# EAGLE board SparkFun_Servo_Trigger_Panel_v11 (EAGLE 7.5.0), part 1 of 4
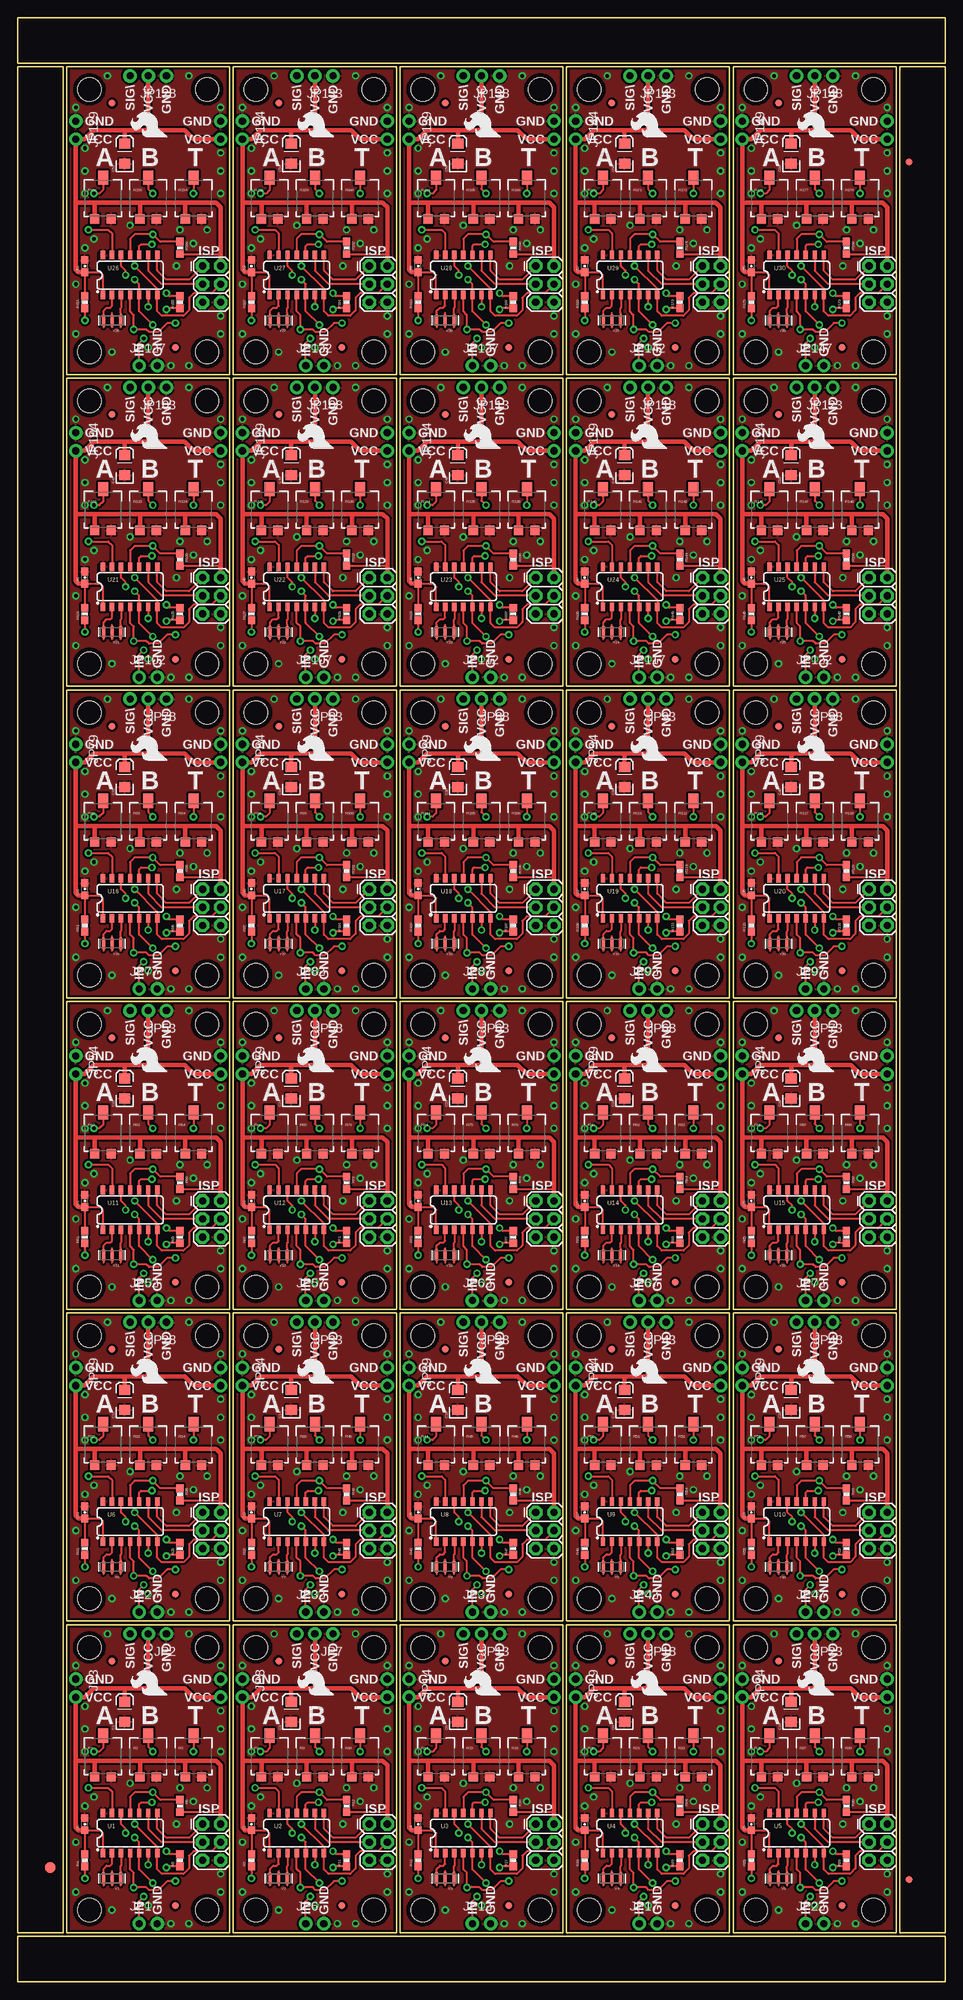
[diagram p0: board, top side]
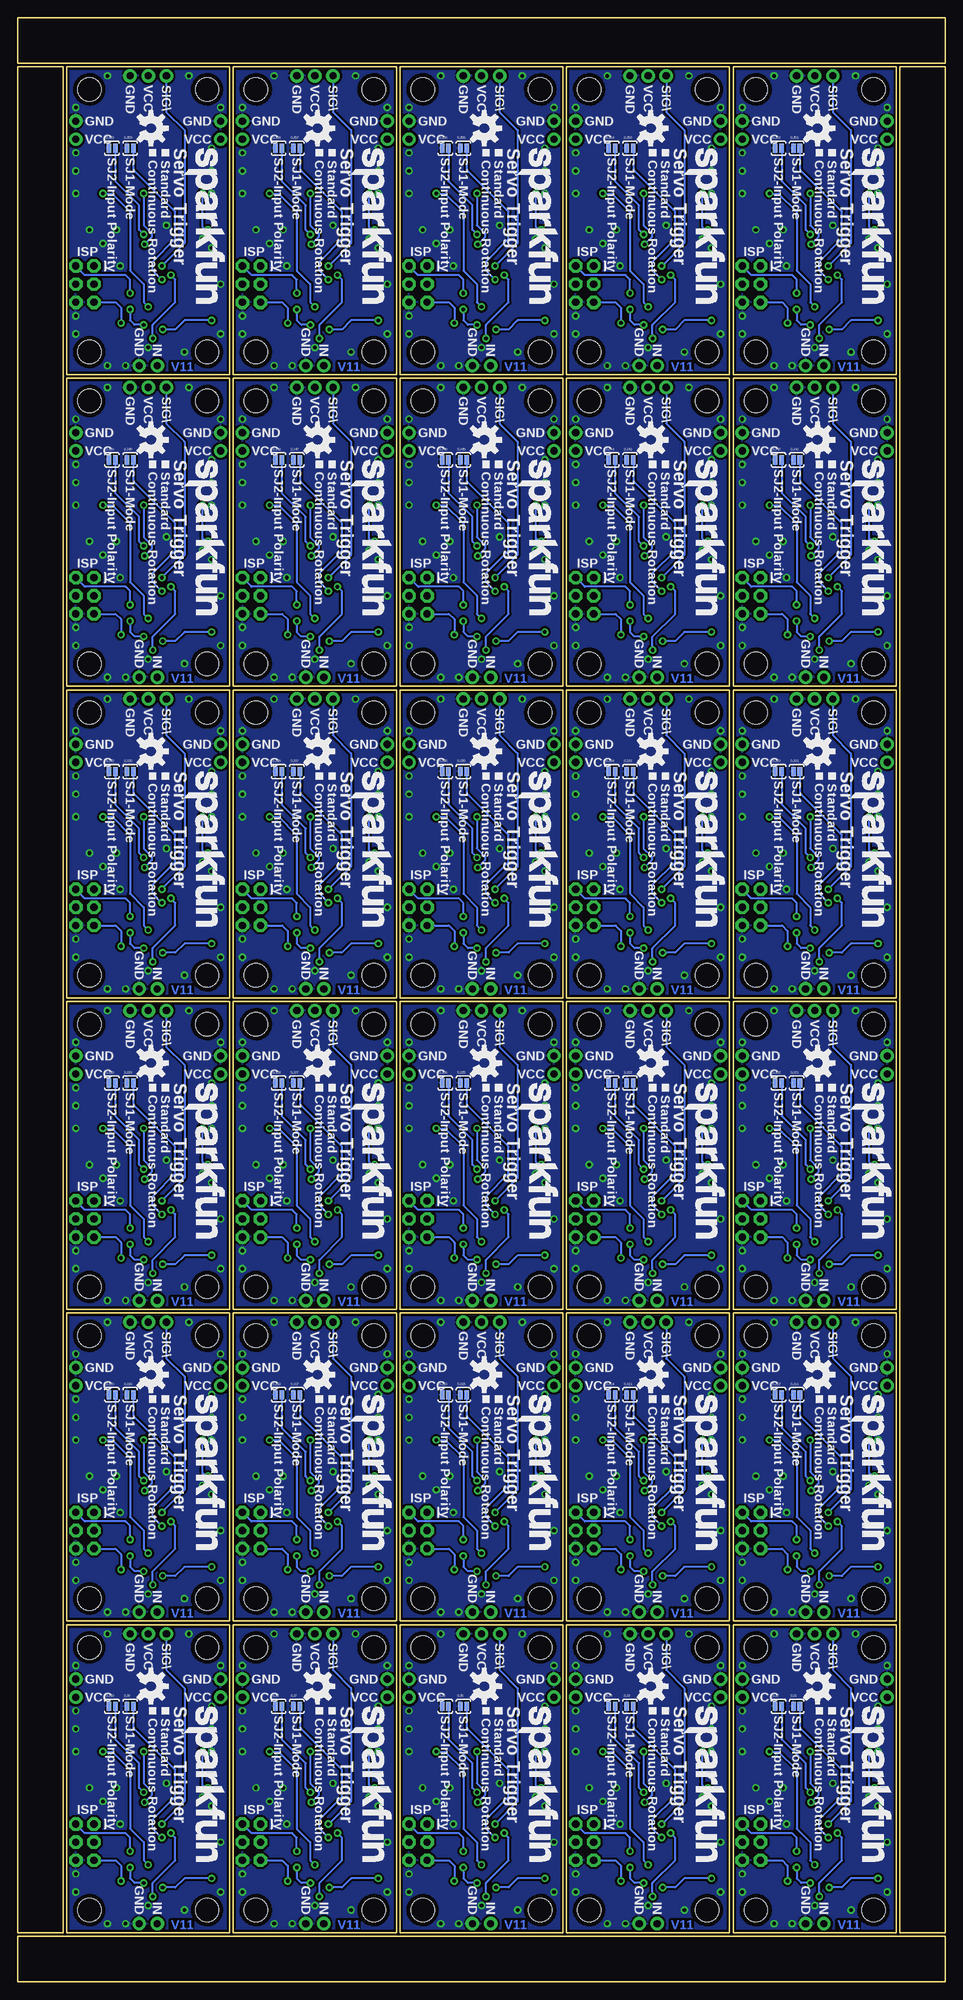
[diagram p1: board, bottom side, seen from below]

Size 130.05 x 275.34 mm. Coordinates in mm from the lower left corner, seen from the top.
Outline: 144 segments
Copper layers (1*16): Top 0.035mm / dielectric 1.5mm / Bottom 0.035mm
Design rules "SparkFun-2-layer-STANDARD": minimum track width 10mil, minimum drill 20mil, track to track 10mil, track to pad 8mil, pad to pad 8mil, via to via 10mil, smd to smd 8mil, copper to edge 8mil, drill to drill 8mil, minimum pad ring 10mil, minimum via ring 10mil, stop-mask expansion 4mil, vias tented up to drill 20mil, thermal gap 10mil
tRestrict: area 11.4,21.6 to 11.6,23.9; area 11.4,22.7 to 13.6,22.9; area 34.8,21.6 to 34.9,23.9; area 34.8,22.7 to 37,22.9; area 58.2,21.6 to 58.3,23.9; area 58.2,22.7 to 60.3,22.9; area 81.5,21.6 to 81.7,23.9; area 81.5,22.7 to 83.7,22.9; area 104.9,21.6 to 105,23.9; area 104.9,22.7 to 107.1,22.9; area 11.4,65.3 to 11.6,67.6; area 11.4,66.4 to 13.6,66.5; 48 more areas

## Footprints (pad centres in the part's own frame; a part is rotated, then mirrored left to right if it is on the bottom)
EIA3216 = smd 1.4 x 1.6: A 1.4,0; C -1.4,0
0603-CAP = smd 1.1 x 1: 1 -0.85,0; 2 0.85,0
FIDUCIAL-1.5X3 = smd 1.5 x 1.5: 1 0,0
FIDUCIAL-1X2 = smd 1 x 1: 1 0,0
1X02_NO_SILK = drill 1.016 pad 1.88: 1 0,0; 2 2.54,0
1X03_NO_SILK = drill 1.016 pad 1.88: 1 0,0; 2 2.54,0; 3 5.08,0
2X3 = drill 1.016 pad 1.88 octagon: 1 0,0; 2 0,2.54; 3 2.54,0; 4 2.54,2.54; 5 5.08,0; 6 5.08,2.54
TRIMPOT_5MM = smd 1.3 x 1.3: A 1.15,-2.54; C -1.15,-2.54 | smd 1.402 x 2: B 0,3.239
0603-RES = smd 1.1 x 1: 1 -0.85,0; 2 0.85,0
PAD-JUMPER-2-NO_YES_SILK = smd 0.635 x 1.27: 1 -0.45,0; 2 0.45,0
STAND-OFF = hole 3.302: 0,0
PAD.03X.04 = smd 1.016 x 1.016: P$1 0,0
SO14 = smd 0.6 x 1.2: 1 -3.81,-2.8; 2 -2.54,-2.8; 3 -1.27,-2.8; 4 0,-2.8; 5 1.27,-2.8; 6 2.54,-2.8; 7 3.81,-2.8; 8 3.81,2.8; 9 2.54,2.8; 10 1.27,2.8; 11 0,2.8; 12 -1.27,2.8; 13 -2.54,2.8; 14 -3.81,2.8
RESONATOR-SMD = smd 0.45 x 1.905: 1 -1.2,0; 2 0,0; 3 1.2,0

## Placement (x,y rotation side)
C1  10uF  [EIA3216]  14.99,37.85 90 top
C2  0.1uF  [0603-CAP]  32.77,22.1 90 top
C3  10uF  [EIA3216]  38.35,37.85 90 top
C4  0.1uF  [0603-CAP]  56.13,22.1 90 top
C5  0.1uF  [0603-CAP]  9.4,22.1 90 top
C6  10uF  [EIA3216]  61.72,37.85 90 top
C7  0.1uF  [0603-CAP]  79.5,22.1 90 top
C8  10uF  [EIA3216]  85.09,37.85 90 top
C9  0.1uF  [0603-CAP]  102.87,22.1 90 top
C10  10uF  [EIA3216]  108.46,37.85 90 top
C11  0.1uF  [0603-CAP]  9.4,65.79 90 top
C12  10uF  [EIA3216]  14.99,81.53 90 top
C13  0.1uF  [0603-CAP]  32.77,65.79 90 top
C14  10uF  [EIA3216]  38.35,81.53 90 top
C15  0.1uF  [0603-CAP]  56.13,65.79 90 top
C16  10uF  [EIA3216]  61.72,81.53 90 top
C17  0.1uF  [0603-CAP]  79.5,65.79 90 top
C18  10uF  [EIA3216]  85.09,81.53 90 top
C19  0.1uF  [0603-CAP]  102.87,65.79 90 top
C20  10uF  [EIA3216]  108.46,81.53 90 top
C21  0.1uF  [0603-CAP]  9.4,109.47 90 top
C22  10uF  [EIA3216]  14.99,125.22 90 top
C23  0.1uF  [0603-CAP]  32.77,109.47 90 top
C24  10uF  [EIA3216]  38.35,125.22 90 top
C25  0.1uF  [0603-CAP]  56.13,109.47 90 top
C26  10uF  [EIA3216]  61.72,125.22 90 top
C27  0.1uF  [0603-CAP]  79.5,109.47 90 top
C28  10uF  [EIA3216]  85.09,125.22 90 top
C29  0.1uF  [0603-CAP]  102.87,109.47 90 top
C30  10uF  [EIA3216]  108.46,125.22 90 top
C31  0.1uF  [0603-CAP]  9.4,153.16 90 top
C32  10uF  [EIA3216]  14.99,168.91 90 top
C33  0.1uF  [0603-CAP]  32.77,153.16 90 top
C34  10uF  [EIA3216]  38.35,168.91 90 top
C35  0.1uF  [0603-CAP]  56.13,153.16 90 top
C36  10uF  [EIA3216]  61.72,168.91 90 top
C37  0.1uF  [0603-CAP]  79.5,153.16 90 top
C38  10uF  [EIA3216]  85.09,168.91 90 top
C39  0.1uF  [0603-CAP]  102.87,153.16 90 top
C40  10uF  [EIA3216]  108.46,168.91 90 top
C41  0.1uF  [0603-CAP]  9.4,196.85 90 top
C42  10uF  [EIA3216]  14.99,212.6 90 top
C43  0.1uF  [0603-CAP]  32.77,196.85 90 top
C44  10uF  [EIA3216]  38.35,212.6 90 top
C45  0.1uF  [0603-CAP]  56.13,196.85 90 top
C46  10uF  [EIA3216]  61.72,212.6 90 top
C47  0.1uF  [0603-CAP]  79.5,196.85 90 top
C48  10uF  [EIA3216]  85.09,212.6 90 top
C49  0.1uF  [0603-CAP]  102.87,196.85 90 top
C50  10uF  [EIA3216]  108.46,212.6 90 top
C51  0.1uF  [0603-CAP]  9.4,240.54 90 top
C52  10uF  [EIA3216]  14.99,256.29 90 top
C53  0.1uF  [0603-CAP]  32.77,240.54 90 top
C54  10uF  [EIA3216]  38.35,256.29 90 top
C55  0.1uF  [0603-CAP]  56.13,240.54 90 top
C56  10uF  [EIA3216]  61.72,256.29 90 top
C57  0.1uF  [0603-CAP]  79.5,240.54 90 top
C58  10uF  [EIA3216]  85.09,256.29 90 top
C59  0.1uF  [0603-CAP]  102.87,240.54 90 top
C60  10uF  [EIA3216]  108.46,256.29 90 top
E$1  [FIDUCIAL-1.5X3]  4.57,16 0 top
E$7  [FIDUCIAL-1X2]  124.97,255.14 90 top
E$8  [FIDUCIAL-1X2]  124.97,14.35 270 top
FID1  FIDUCIAL1X2  [FIDUCIAL-1X2]  13.21,44.96 0 top
FID2  FIDUCIAL1X2  [FIDUCIAL-1X2]  22.1,10.67 0 top
FID3  FIDUCIAL1X2  [FIDUCIAL-1X2]  36.58,44.96 0 top
FID4  FIDUCIAL1X2  [FIDUCIAL-1X2]  45.47,10.67 0 top
FID5  FIDUCIAL1X2  [FIDUCIAL-1X2]  59.94,44.96 0 top
FID6  FIDUCIAL1X2  [FIDUCIAL-1X2]  68.83,10.67 0 top
FID7  FIDUCIAL1X2  [FIDUCIAL-1X2]  83.31,44.96 0 top
FID8  FIDUCIAL1X2  [FIDUCIAL-1X2]  92.2,10.67 0 top
FID9  FIDUCIAL1X2  [FIDUCIAL-1X2]  106.68,44.96 0 top
FID10  FIDUCIAL1X2  [FIDUCIAL-1X2]  115.57,10.67 0 top
FID11  FIDUCIAL1X2  [FIDUCIAL-1X2]  13.21,88.65 0 top
FID12  FIDUCIAL1X2  [FIDUCIAL-1X2]  22.1,54.36 0 top
FID13  FIDUCIAL1X2  [FIDUCIAL-1X2]  36.58,88.65 0 top
FID14  FIDUCIAL1X2  [FIDUCIAL-1X2]  45.47,54.36 0 top
FID15  FIDUCIAL1X2  [FIDUCIAL-1X2]  59.94,88.65 0 top
FID16  FIDUCIAL1X2  [FIDUCIAL-1X2]  68.83,54.36 0 top
FID17  FIDUCIAL1X2  [FIDUCIAL-1X2]  83.31,88.65 0 top
FID18  FIDUCIAL1X2  [FIDUCIAL-1X2]  92.2,54.36 0 top
FID19  FIDUCIAL1X2  [FIDUCIAL-1X2]  106.68,88.65 0 top
FID20  FIDUCIAL1X2  [FIDUCIAL-1X2]  115.57,54.36 0 top
FID21  FIDUCIAL1X2  [FIDUCIAL-1X2]  13.21,132.33 0 top
FID22  FIDUCIAL1X2  [FIDUCIAL-1X2]  22.1,98.04 0 top
FID23  FIDUCIAL1X2  [FIDUCIAL-1X2]  36.58,132.33 0 top
FID24  FIDUCIAL1X2  [FIDUCIAL-1X2]  45.47,98.04 0 top
FID25  FIDUCIAL1X2  [FIDUCIAL-1X2]  59.94,132.33 0 top
FID26  FIDUCIAL1X2  [FIDUCIAL-1X2]  68.83,98.04 0 top
FID27  FIDUCIAL1X2  [FIDUCIAL-1X2]  83.31,132.33 0 top
FID28  FIDUCIAL1X2  [FIDUCIAL-1X2]  92.2,98.04 0 top
FID29  FIDUCIAL1X2  [FIDUCIAL-1X2]  106.68,132.33 0 top
FID30  FIDUCIAL1X2  [FIDUCIAL-1X2]  115.57,98.04 0 top
FID31  FIDUCIAL1X2  [FIDUCIAL-1X2]  13.21,176.02 0 top
FID32  FIDUCIAL1X2  [FIDUCIAL-1X2]  22.1,141.73 0 top
FID33  FIDUCIAL1X2  [FIDUCIAL-1X2]  36.58,176.02 0 top
FID34  FIDUCIAL1X2  [FIDUCIAL-1X2]  45.47,141.73 0 top
FID35  FIDUCIAL1X2  [FIDUCIAL-1X2]  59.94,176.02 0 top
FID36  FIDUCIAL1X2  [FIDUCIAL-1X2]  68.83,141.73 0 top
FID37  FIDUCIAL1X2  [FIDUCIAL-1X2]  83.31,176.02 0 top
FID38  FIDUCIAL1X2  [FIDUCIAL-1X2]  92.2,141.73 0 top
FID39  FIDUCIAL1X2  [FIDUCIAL-1X2]  106.68,176.02 0 top
FID40  FIDUCIAL1X2  [FIDUCIAL-1X2]  115.57,141.73 0 top
FID41  FIDUCIAL1X2  [FIDUCIAL-1X2]  13.21,219.71 0 top
FID42  FIDUCIAL1X2  [FIDUCIAL-1X2]  22.1,185.42 0 top
FID43  FIDUCIAL1X2  [FIDUCIAL-1X2]  36.58,219.71 0 top
FID44  FIDUCIAL1X2  [FIDUCIAL-1X2]  45.47,185.42 0 top
FID45  FIDUCIAL1X2  [FIDUCIAL-1X2]  59.94,219.71 0 top
FID46  FIDUCIAL1X2  [FIDUCIAL-1X2]  68.83,185.42 0 top
FID47  FIDUCIAL1X2  [FIDUCIAL-1X2]  83.31,219.71 0 top
FID48  FIDUCIAL1X2  [FIDUCIAL-1X2]  92.2,185.42 0 top
FID49  FIDUCIAL1X2  [FIDUCIAL-1X2]  106.68,219.71 0 top
FID50  FIDUCIAL1X2  [FIDUCIAL-1X2]  115.57,185.42 0 top
FID51  FIDUCIAL1X2  [FIDUCIAL-1X2]  13.21,263.4 0 top
FID52  FIDUCIAL1X2  [FIDUCIAL-1X2]  22.1,229.11 0 top
FID53  FIDUCIAL1X2  [FIDUCIAL-1X2]  36.58,263.4 0 top
FID54  FIDUCIAL1X2  [FIDUCIAL-1X2]  45.47,229.11 0 top
FID55  FIDUCIAL1X2  [FIDUCIAL-1X2]  59.94,263.4 0 top
FID56  FIDUCIAL1X2  [FIDUCIAL-1X2]  68.83,229.11 0 top
FID57  FIDUCIAL1X2  [FIDUCIAL-1X2]  83.31,263.4 0 top
FID58  FIDUCIAL1X2  [FIDUCIAL-1X2]  92.2,229.11 0 top
FID59  FIDUCIAL1X2  [FIDUCIAL-1X2]  106.68,263.4 0 top
FID60  FIDUCIAL1X2  [FIDUCIAL-1X2]  115.57,229.11 0 top
JP1  M021X02_NO_SILK  [1X02_NO_SILK]  17.02,8.13 0 top
JP2  SERVO-OUT  [1X03_NO_SILK]  20.83,48.77 180 top
JP3  M021X02_NO_SILK  [1X02_NO_SILK]  8.13,42.42 270 top
JP4  M021X02_NO_SILK  [1X02_NO_SILK]  28.45,42.42 270 top
JP5  [2X3]  49.28,22.1 270 top
JP6  M021X02_NO_SILK  [1X02_NO_SILK]  40.39,8.13 0 top
JP7  SERVO-OUT  [1X03_NO_SILK]  44.2,48.77 180 top
JP8  M021X02_NO_SILK  [1X02_NO_SILK]  31.5,42.42 270 top
JP9  [2X3]  25.91,22.1 270 top
JP10  M021X02_NO_SILK  [1X02_NO_SILK]  51.82,42.42 270 top
JP11  [2X3]  72.64,22.1 270 top
JP12  M021X02_NO_SILK  [1X02_NO_SILK]  63.75,8.13 0 top
JP13  SERVO-OUT  [1X03_NO_SILK]  67.56,48.77 180 top
JP14  M021X02_NO_SILK  [1X02_NO_SILK]  54.86,42.42 270 top
JP15  M021X02_NO_SILK  [1X02_NO_SILK]  75.18,42.42 270 top
JP16  [2X3]  96.01,22.1 270 top
JP17  M021X02_NO_SILK  [1X02_NO_SILK]  87.12,8.13 0 top
JP18  SERVO-OUT  [1X03_NO_SILK]  90.93,48.77 180 top
JP19  M021X02_NO_SILK  [1X02_NO_SILK]  78.23,42.42 270 top
JP20  M021X02_NO_SILK  [1X02_NO_SILK]  98.55,42.42 270 top
JP21  [2X3]  119.38,22.1 270 top
JP22  M021X02_NO_SILK  [1X02_NO_SILK]  110.49,8.13 0 top
JP23  SERVO-OUT  [1X03_NO_SILK]  114.3,48.77 180 top
JP24  M021X02_NO_SILK  [1X02_NO_SILK]  101.6,42.42 270 top
JP25  M021X02_NO_SILK  [1X02_NO_SILK]  121.92,42.42 270 top
JP26  [2X3]  25.91,65.79 270 top
JP27  M021X02_NO_SILK  [1X02_NO_SILK]  17.02,51.82 0 top
JP28  SERVO-OUT  [1X03_NO_SILK]  20.83,92.46 180 top
JP29  M021X02_NO_SILK  [1X02_NO_SILK]  8.13,86.11 270 top
JP30  M021X02_NO_SILK  [1X02_NO_SILK]  28.45,86.11 270 top
JP31  [2X3]  49.28,65.79 270 top
JP32  M021X02_NO_SILK  [1X02_NO_SILK]  40.39,51.82 0 top
JP33  SERVO-OUT  [1X03_NO_SILK]  44.2,92.46 180 top
JP34  M021X02_NO_SILK  [1X02_NO_SILK]  31.5,86.11 270 top
JP35  M021X02_NO_SILK  [1X02_NO_SILK]  51.82,86.11 270 top
JP36  [2X3]  72.64,65.79 270 top
JP37  M021X02_NO_SILK  [1X02_NO_SILK]  63.75,51.82 0 top
JP38  SERVO-OUT  [1X03_NO_SILK]  67.56,92.46 180 top
JP39  M021X02_NO_SILK  [1X02_NO_SILK]  54.86,86.11 270 top
JP40  M021X02_NO_SILK  [1X02_NO_SILK]  75.18,86.11 270 top
JP41  [2X3]  96.01,65.79 270 top
JP42  M021X02_NO_SILK  [1X02_NO_SILK]  87.12,51.82 0 top
JP43  SERVO-OUT  [1X03_NO_SILK]  90.93,92.46 180 top
JP44  M021X02_NO_SILK  [1X02_NO_SILK]  78.23,86.11 270 top
JP45  M021X02_NO_SILK  [1X02_NO_SILK]  98.55,86.11 270 top
JP46  [2X3]  119.38,65.79 270 top
JP47  M021X02_NO_SILK  [1X02_NO_SILK]  110.49,51.82 0 top
JP48  SERVO-OUT  [1X03_NO_SILK]  114.3,92.46 180 top
JP49  M021X02_NO_SILK  [1X02_NO_SILK]  101.6,86.11 270 top
JP50  M021X02_NO_SILK  [1X02_NO_SILK]  121.92,86.11 270 top
JP51  [2X3]  25.91,109.47 270 top
JP52  M021X02_NO_SILK  [1X02_NO_SILK]  17.02,95.5 0 top
JP53  SERVO-OUT  [1X03_NO_SILK]  20.83,136.14 180 top
JP54  M021X02_NO_SILK  [1X02_NO_SILK]  8.13,129.79 270 top
JP55  M021X02_NO_SILK  [1X02_NO_SILK]  28.45,129.79 270 top
JP56  [2X3]  49.28,109.47 270 top
JP57  M021X02_NO_SILK  [1X02_NO_SILK]  40.39,95.5 0 top
JP58  SERVO-OUT  [1X03_NO_SILK]  44.2,136.14 180 top
JP59  M021X02_NO_SILK  [1X02_NO_SILK]  31.5,129.79 270 top
JP60  M021X02_NO_SILK  [1X02_NO_SILK]  51.82,129.79 270 top
JP61  [2X3]  72.64,109.47 270 top
JP62  M021X02_NO_SILK  [1X02_NO_SILK]  63.75,95.5 0 top
JP63  SERVO-OUT  [1X03_NO_SILK]  67.56,136.14 180 top
JP64  M021X02_NO_SILK  [1X02_NO_SILK]  54.86,129.79 270 top
JP65  M021X02_NO_SILK  [1X02_NO_SILK]  75.18,129.79 270 top
JP66  [2X3]  96.01,109.47 270 top
JP67  M021X02_NO_SILK  [1X02_NO_SILK]  87.12,95.5 0 top
JP68  SERVO-OUT  [1X03_NO_SILK]  90.93,136.14 180 top
JP69  M021X02_NO_SILK  [1X02_NO_SILK]  78.23,129.79 270 top
JP70  M021X02_NO_SILK  [1X02_NO_SILK]  98.55,129.79 270 top
JP71  [2X3]  119.38,109.47 270 top
JP72  M021X02_NO_SILK  [1X02_NO_SILK]  110.49,95.5 0 top
JP73  SERVO-OUT  [1X03_NO_SILK]  114.3,136.14 180 top
JP74  M021X02_NO_SILK  [1X02_NO_SILK]  101.6,129.79 270 top
JP75  M021X02_NO_SILK  [1X02_NO_SILK]  121.92,129.79 270 top
JP76  [2X3]  25.91,153.16 270 top
JP77  M021X02_NO_SILK  [1X02_NO_SILK]  17.02,139.19 0 top
JP78  SERVO-OUT  [1X03_NO_SILK]  20.83,179.83 180 top
JP79  M021X02_NO_SILK  [1X02_NO_SILK]  8.13,173.48 270 top
JP80  M021X02_NO_SILK  [1X02_NO_SILK]  28.45,173.48 270 top
JP81  [2X3]  49.28,153.16 270 top
JP82  M021X02_NO_SILK  [1X02_NO_SILK]  40.39,139.19 0 top
JP83  SERVO-OUT  [1X03_NO_SILK]  44.2,179.83 180 top
JP84  M021X02_NO_SILK  [1X02_NO_SILK]  31.5,173.48 270 top
JP85  M021X02_NO_SILK  [1X02_NO_SILK]  51.82,173.48 270 top
JP86  [2X3]  72.64,153.16 270 top
JP87  M021X02_NO_SILK  [1X02_NO_SILK]  63.75,139.19 0 top
JP88  SERVO-OUT  [1X03_NO_SILK]  67.56,179.83 180 top
JP89  M021X02_NO_SILK  [1X02_NO_SILK]  54.86,173.48 270 top
JP90  M021X02_NO_SILK  [1X02_NO_SILK]  75.18,173.48 270 top
JP91  [2X3]  96.01,153.16 270 top
JP92  M021X02_NO_SILK  [1X02_NO_SILK]  87.12,139.19 0 top
JP93  SERVO-OUT  [1X03_NO_SILK]  90.93,179.83 180 top
JP94  M021X02_NO_SILK  [1X02_NO_SILK]  78.23,173.48 270 top
JP95  M021X02_NO_SILK  [1X02_NO_SILK]  98.55,173.48 270 top
JP96  [2X3]  119.38,153.16 270 top
JP97  M021X02_NO_SILK  [1X02_NO_SILK]  110.49,139.19 0 top
JP98  SERVO-OUT  [1X03_NO_SILK]  114.3,179.83 180 top
JP99  M021X02_NO_SILK  [1X02_NO_SILK]  101.6,173.48 270 top
JP100  M021X02_NO_SILK  [1X02_NO_SILK]  121.92,173.48 270 top
JP101  [2X3]  25.91,196.85 270 top
JP102  M021X02_NO_SILK  [1X02_NO_SILK]  17.02,182.88 0 top
JP103  SERVO-OUT  [1X03_NO_SILK]  20.83,223.52 180 top
JP104  M021X02_NO_SILK  [1X02_NO_SILK]  8.13,217.17 270 top
JP105  M021X02_NO_SILK  [1X02_NO_SILK]  28.45,217.17 270 top
JP106  [2X3]  49.28,196.85 270 top
JP107  M021X02_NO_SILK  [1X02_NO_SILK]  40.39,182.88 0 top
JP108  SERVO-OUT  [1X03_NO_SILK]  44.2,223.52 180 top
JP109  M021X02_NO_SILK  [1X02_NO_SILK]  31.5,217.17 270 top
JP110  M021X02_NO_SILK  [1X02_NO_SILK]  51.82,217.17 270 top
JP111  [2X3]  72.64,196.85 270 top
JP112  M021X02_NO_SILK  [1X02_NO_SILK]  63.75,182.88 0 top
JP113  SERVO-OUT  [1X03_NO_SILK]  67.56,223.52 180 top
JP114  M021X02_NO_SILK  [1X02_NO_SILK]  54.86,217.17 270 top
JP115  M021X02_NO_SILK  [1X02_NO_SILK]  75.18,217.17 270 top
JP116  [2X3]  96.01,196.85 270 top
JP117  M021X02_NO_SILK  [1X02_NO_SILK]  87.12,182.88 0 top
JP118  SERVO-OUT  [1X03_NO_SILK]  90.93,223.52 180 top
JP119  M021X02_NO_SILK  [1X02_NO_SILK]  78.23,217.17 270 top
JP120  M021X02_NO_SILK  [1X02_NO_SILK]  98.55,217.17 270 top
JP121  [2X3]  119.38,196.85 270 top
JP122  M021X02_NO_SILK  [1X02_NO_SILK]  110.49,182.88 0 top
JP123  SERVO-OUT  [1X03_NO_SILK]  114.3,223.52 180 top
JP124  M021X02_NO_SILK  [1X02_NO_SILK]  101.6,217.17 270 top
JP125  M021X02_NO_SILK  [1X02_NO_SILK]  121.92,217.17 270 top
JP126  [2X3]  25.91,240.54 270 top
JP127  M021X02_NO_SILK  [1X02_NO_SILK]  17.02,226.57 0 top
JP128  SERVO-OUT  [1X03_NO_SILK]  20.83,267.21 180 top
JP129  M021X02_NO_SILK  [1X02_NO_SILK]  8.13,260.86 270 top
JP130  M021X02_NO_SILK  [1X02_NO_SILK]  28.45,260.86 270 top
JP131  [2X3]  49.28,240.54 270 top
JP132  M021X02_NO_SILK  [1X02_NO_SILK]  40.39,226.57 0 top
JP133  SERVO-OUT  [1X03_NO_SILK]  44.2,267.21 180 top
JP134  M021X02_NO_SILK  [1X02_NO_SILK]  31.5,260.86 270 top
JP135  M021X02_NO_SILK  [1X02_NO_SILK]  51.82,260.86 270 top
JP136  [2X3]  72.64,240.54 270 top
JP137  M021X02_NO_SILK  [1X02_NO_SILK]  63.75,226.57 0 top
JP138  SERVO-OUT  [1X03_NO_SILK]  67.56,267.21 180 top
JP139  M021X02_NO_SILK  [1X02_NO_SILK]  54.86,260.86 270 top
JP140  M021X02_NO_SILK  [1X02_NO_SILK]  75.18,260.86 270 top
JP141  [2X3]  96.01,240.54 270 top
JP142  M021X02_NO_SILK  [1X02_NO_SILK]  87.12,226.57 0 top
JP143  SERVO-OUT  [1X03_NO_SILK]  90.93,267.21 180 top
JP144  M021X02_NO_SILK  [1X02_NO_SILK]  78.23,260.86 270 top
JP145  M021X02_NO_SILK  [1X02_NO_SILK]  98.55,260.86 270 top
JP146  [2X3]  119.38,240.54 270 top
JP147  M021X02_NO_SILK  [1X02_NO_SILK]  110.49,226.57 0 top
JP148  SERVO-OUT  [1X03_NO_SILK]  114.3,267.21 180 top
JP149  M021X02_NO_SILK  [1X02_NO_SILK]  101.6,260.86 270 top
JP150  M021X02_NO_SILK  [1X02_NO_SILK]  121.92,260.86 270 top
LOGO1  OSHW-LOGOM  [OSHW-LOGO-M]  17.91,41.42 270 bottom
LOGO2  SFE_LOGO_NAME.2_INCH  [SFE_LOGO_NAME_.2]  13.21,38.61 270 bottom
LOGO3  SFE_LOGO_FLAME.2_INCH  [SFE_LOGO_FLAME_.2]  21.21,39.88 90 top
LOGO4  OSHW-LOGOM  [OSHW-LOGO-M]  41.27,41.42 270 bottom
LOGO5  SFE_LOGO_NAME.2_INCH  [SFE_LOGO_NAME_.2]  36.58,38.61 270 bottom
LOGO6  SFE_LOGO_FLAME.2_INCH  [SFE_LOGO_FLAME_.2]  44.58,39.88 90 top
LOGO7  OSHW-LOGOM  [OSHW-LOGO-M]  64.64,41.42 270 bottom
LOGO8  SFE_LOGO_NAME.2_INCH  [SFE_LOGO_NAME_.2]  59.94,38.61 270 bottom
LOGO9  SFE_LOGO_FLAME.2_INCH  [SFE_LOGO_FLAME_.2]  67.94,39.88 90 top
LOGO10  OSHW-LOGOM  [OSHW-LOGO-M]  88.01,41.42 270 bottom
LOGO11  SFE_LOGO_NAME.2_INCH  [SFE_LOGO_NAME_.2]  83.31,38.61 270 bottom
LOGO12  SFE_LOGO_FLAME.2_INCH  [SFE_LOGO_FLAME_.2]  91.31,39.88 90 top
LOGO13  OSHW-LOGOM  [OSHW-LOGO-M]  111.38,41.42 270 bottom
LOGO14  SFE_LOGO_NAME.2_INCH  [SFE_LOGO_NAME_.2]  106.68,38.61 270 bottom
LOGO15  SFE_LOGO_FLAME.2_INCH  [SFE_LOGO_FLAME_.2]  114.68,39.88 90 top
LOGO16  OSHW-LOGOM  [OSHW-LOGO-M]  17.91,85.11 270 bottom
LOGO17  SFE_LOGO_NAME.2_INCH  [SFE_LOGO_NAME_.2]  13.21,82.3 270 bottom
LOGO18  SFE_LOGO_FLAME.2_INCH  [SFE_LOGO_FLAME_.2]  21.21,83.57 90 top
LOGO19  OSHW-LOGOM  [OSHW-LOGO-M]  41.27,85.11 270 bottom
LOGO20  SFE_LOGO_NAME.2_INCH  [SFE_LOGO_NAME_.2]  36.58,82.3 270 bottom
LOGO21  SFE_LOGO_FLAME.2_INCH  [SFE_LOGO_FLAME_.2]  44.58,83.57 90 top
LOGO22  OSHW-LOGOM  [OSHW-LOGO-M]  64.64,85.11 270 bottom
LOGO23  SFE_LOGO_NAME.2_INCH  [SFE_LOGO_NAME_.2]  59.94,82.3 270 bottom
LOGO24  SFE_LOGO_FLAME.2_INCH  [SFE_LOGO_FLAME_.2]  67.94,83.57 90 top
LOGO25  OSHW-LOGOM  [OSHW-LOGO-M]  88.01,85.11 270 bottom
LOGO26  SFE_LOGO_NAME.2_INCH  [SFE_LOGO_NAME_.2]  83.31,82.3 270 bottom
LOGO27  SFE_LOGO_FLAME.2_INCH  [SFE_LOGO_FLAME_.2]  91.31,83.57 90 top
LOGO28  OSHW-LOGOM  [OSHW-LOGO-M]  111.38,85.11 270 bottom
LOGO29  SFE_LOGO_NAME.2_INCH  [SFE_LOGO_NAME_.2]  106.68,82.3 270 bottom
LOGO30  SFE_LOGO_FLAME.2_INCH  [SFE_LOGO_FLAME_.2]  114.68,83.57 90 top
LOGO31  OSHW-LOGOM  [OSHW-LOGO-M]  17.91,128.79 270 bottom
LOGO32  SFE_LOGO_NAME.2_INCH  [SFE_LOGO_NAME_.2]  13.21,125.98 270 bottom
LOGO33  SFE_LOGO_FLAME.2_INCH  [SFE_LOGO_FLAME_.2]  21.21,127.25 90 top
LOGO34  OSHW-LOGOM  [OSHW-LOGO-M]  41.27,128.79 270 bottom
LOGO35  SFE_LOGO_NAME.2_INCH  [SFE_LOGO_NAME_.2]  36.58,125.98 270 bottom
LOGO36  SFE_LOGO_FLAME.2_INCH  [SFE_LOGO_FLAME_.2]  44.58,127.25 90 top
LOGO37  OSHW-LOGOM  [OSHW-LOGO-M]  64.64,128.79 270 bottom
LOGO38  SFE_LOGO_NAME.2_INCH  [SFE_LOGO_NAME_.2]  59.94,125.98 270 bottom
LOGO39  SFE_LOGO_FLAME.2_INCH  [SFE_LOGO_FLAME_.2]  67.94,127.25 90 top
LOGO40  OSHW-LOGOM  [OSHW-LOGO-M]  88.01,128.79 270 bottom
LOGO41  SFE_LOGO_NAME.2_INCH  [SFE_LOGO_NAME_.2]  83.31,125.98 270 bottom
LOGO42  SFE_LOGO_FLAME.2_INCH  [SFE_LOGO_FLAME_.2]  91.31,127.25 90 top
LOGO43  OSHW-LOGOM  [OSHW-LOGO-M]  111.38,128.79 270 bottom
LOGO44  SFE_LOGO_NAME.2_INCH  [SFE_LOGO_NAME_.2]  106.68,125.98 270 bottom
LOGO45  SFE_LOGO_FLAME.2_INCH  [SFE_LOGO_FLAME_.2]  114.68,127.25 90 top
LOGO46  OSHW-LOGOM  [OSHW-LOGO-M]  17.91,172.48 270 bottom
LOGO47  SFE_LOGO_NAME.2_INCH  [SFE_LOGO_NAME_.2]  13.21,169.67 270 bottom
LOGO48  SFE_LOGO_FLAME.2_INCH  [SFE_LOGO_FLAME_.2]  21.21,170.94 90 top
LOGO49  OSHW-LOGOM  [OSHW-LOGO-M]  41.27,172.48 270 bottom
LOGO50  SFE_LOGO_NAME.2_INCH  [SFE_LOGO_NAME_.2]  36.58,169.67 270 bottom
LOGO51  SFE_LOGO_FLAME.2_INCH  [SFE_LOGO_FLAME_.2]  44.58,170.94 90 top
LOGO52  OSHW-LOGOM  [OSHW-LOGO-M]  64.64,172.48 270 bottom
LOGO53  SFE_LOGO_NAME.2_INCH  [SFE_LOGO_NAME_.2]  59.94,169.67 270 bottom
LOGO54  SFE_LOGO_FLAME.2_INCH  [SFE_LOGO_FLAME_.2]  67.94,170.94 90 top
LOGO55  OSHW-LOGOM  [OSHW-LOGO-M]  88.01,172.48 270 bottom
LOGO56  SFE_LOGO_NAME.2_INCH  [SFE_LOGO_NAME_.2]  83.31,169.67 270 bottom
LOGO57  SFE_LOGO_FLAME.2_INCH  [SFE_LOGO_FLAME_.2]  91.31,170.94 90 top
LOGO58  OSHW-LOGOM  [OSHW-LOGO-M]  111.38,172.48 270 bottom
LOGO59  SFE_LOGO_NAME.2_INCH  [SFE_LOGO_NAME_.2]  106.68,169.67 270 bottom
LOGO60  SFE_LOGO_FLAME.2_INCH  [SFE_LOGO_FLAME_.2]  114.68,170.94 90 top
LOGO61  OSHW-LOGOM  [OSHW-LOGO-M]  17.91,216.17 270 bottom
LOGO62  SFE_LOGO_NAME.2_INCH  [SFE_LOGO_NAME_.2]  13.21,213.36 270 bottom
LOGO63  SFE_LOGO_FLAME.2_INCH  [SFE_LOGO_FLAME_.2]  21.21,214.63 90 top
LOGO64  OSHW-LOGOM  [OSHW-LOGO-M]  41.27,216.17 270 bottom
LOGO65  SFE_LOGO_NAME.2_INCH  [SFE_LOGO_NAME_.2]  36.58,213.36 270 bottom
LOGO66  SFE_LOGO_FLAME.2_INCH  [SFE_LOGO_FLAME_.2]  44.58,214.63 90 top
LOGO67  OSHW-LOGOM  [OSHW-LOGO-M]  64.64,216.17 270 bottom
LOGO68  SFE_LOGO_NAME.2_INCH  [SFE_LOGO_NAME_.2]  59.94,213.36 270 bottom
LOGO69  SFE_LOGO_FLAME.2_INCH  [SFE_LOGO_FLAME_.2]  67.94,214.63 90 top
LOGO70  OSHW-LOGOM  [OSHW-LOGO-M]  88.01,216.17 270 bottom
LOGO71  SFE_LOGO_NAME.2_INCH  [SFE_LOGO_NAME_.2]  83.31,213.36 270 bottom
LOGO72  SFE_LOGO_FLAME.2_INCH  [SFE_LOGO_FLAME_.2]  91.31,214.63 90 top
LOGO73  OSHW-LOGOM  [OSHW-LOGO-M]  111.38,216.17 270 bottom
LOGO74  SFE_LOGO_NAME.2_INCH  [SFE_LOGO_NAME_.2]  106.68,213.36 270 bottom
LOGO75  SFE_LOGO_FLAME.2_INCH  [SFE_LOGO_FLAME_.2]  114.68,214.63 90 top
LOGO76  OSHW-LOGOM  [OSHW-LOGO-M]  17.91,259.86 270 bottom
LOGO77  SFE_LOGO_NAME.2_INCH  [SFE_LOGO_NAME_.2]  13.21,257.05 270 bottom
LOGO78  SFE_LOGO_FLAME.2_INCH  [SFE_LOGO_FLAME_.2]  21.21,258.32 90 top
LOGO79  OSHW-LOGOM  [OSHW-LOGO-M]  41.27,259.86 270 bottom
LOGO80  SFE_LOGO_NAME.2_INCH  [SFE_LOGO_NAME_.2]  36.58,257.05 270 bottom
LOGO81  SFE_LOGO_FLAME.2_INCH  [SFE_LOGO_FLAME_.2]  44.58,258.32 90 top
LOGO82  OSHW-LOGOM  [OSHW-LOGO-M]  64.64,259.86 270 bottom
LOGO83  SFE_LOGO_NAME.2_INCH  [SFE_LOGO_NAME_.2]  59.94,257.05 270 bottom
LOGO84  SFE_LOGO_FLAME.2_INCH  [SFE_LOGO_FLAME_.2]  67.94,258.32 90 top
LOGO85  OSHW-LOGOM  [OSHW-LOGO-M]  88.01,259.86 270 bottom
LOGO86  SFE_LOGO_NAME.2_INCH  [SFE_LOGO_NAME_.2]  83.31,257.05 270 bottom
LOGO87  SFE_LOGO_FLAME.2_INCH  [SFE_LOGO_FLAME_.2]  91.31,258.32 90 top
LOGO88  OSHW-LOGOM  [OSHW-LOGO-M]  111.38,259.86 270 bottom
LOGO89  SFE_LOGO_NAME.2_INCH  [SFE_LOGO_NAME_.2]  106.68,257.05 270 bottom
LOGO90  SFE_LOGO_FLAME.2_INCH  [SFE_LOGO_FLAME_.2]  114.68,258.32 90 top
R1  10k  [TRIMPOT_5MM]  11.94,31.26 0 top
R2  10k  [TRIMPOT_5MM]  18.29,31.26 0 top
R3  10k  [TRIMPOT_5MM]  24.64,31.26 0 top
R4  10K  [0603-RES]  9.4,17.02 90 top
R5  10K  [0603-RES]  22.73,17.02 90 top
R6  10K  [0603-RES]  22.73,24.64 270 top
R7  10K  [0603-RES]  32.77,17.02 90 top
R8  10k  [TRIMPOT_5MM]  35.31,31.26 0 top
R9  10k  [TRIMPOT_5MM]  41.66,31.26 0 top
R10  10k  [TRIMPOT_5MM]  48.01,31.26 0 top
R11  10K  [0603-RES]  46.1,17.02 90 top
R12  10K  [0603-RES]  46.1,24.64 270 top
R13  10K  [0603-RES]  56.13,17.02 90 top
R14  10k  [TRIMPOT_5MM]  58.67,31.26 0 top
R15  10k  [TRIMPOT_5MM]  65.02,31.26 0 top
R16  10k  [TRIMPOT_5MM]  71.37,31.26 0 top
R17  10K  [0603-RES]  69.47,17.02 90 top
R18  10K  [0603-RES]  69.47,24.64 270 top
R19  10K  [0603-RES]  79.5,17.02 90 top
R20  10k  [TRIMPOT_5MM]  82.04,31.26 0 top
R21  10k  [TRIMPOT_5MM]  88.39,31.26 0 top
R22  10k  [TRIMPOT_5MM]  94.74,31.26 0 top
R23  10K  [0603-RES]  92.84,17.02 90 top
R24  10K  [0603-RES]  92.84,24.64 270 top
R25  10K  [0603-RES]  102.87,17.02 90 top
R26  10k  [TRIMPOT_5MM]  105.41,31.26 0 top
R27  10k  [TRIMPOT_5MM]  111.76,31.26 0 top
R28  10k  [TRIMPOT_5MM]  118.11,31.26 0 top
R29  10K  [0603-RES]  116.2,17.02 90 top
R30  10K  [0603-RES]  116.2,24.64 270 top
R31  10K  [0603-RES]  9.4,60.71 90 top
R32  10k  [TRIMPOT_5MM]  11.94,74.95 0 top
R33  10k  [TRIMPOT_5MM]  18.29,74.95 0 top
R34  10k  [TRIMPOT_5MM]  24.64,74.95 0 top
R35  10K  [0603-RES]  22.73,60.71 90 top
R36  10K  [0603-RES]  22.73,68.33 270 top
R37  10K  [0603-RES]  32.77,60.71 90 top
R38  10k  [TRIMPOT_5MM]  35.31,74.95 0 top
R39  10k  [TRIMPOT_5MM]  41.66,74.95 0 top
R40  10k  [TRIMPOT_5MM]  48.01,74.95 0 top
R41  10K  [0603-RES]  46.1,60.71 90 top
R42  10K  [0603-RES]  46.1,68.33 270 top
R43  10K  [0603-RES]  56.13,60.71 90 top
R44  10k  [TRIMPOT_5MM]  58.67,74.95 0 top
R45  10k  [TRIMPOT_5MM]  65.02,74.95 0 top
R46  10k  [TRIMPOT_5MM]  71.37,74.95 0 top
R47  10K  [0603-RES]  69.47,60.71 90 top
R48  10K  [0603-RES]  69.47,68.33 270 top
R49  10K  [0603-RES]  79.5,60.71 90 top
R50  10k  [TRIMPOT_5MM]  82.04,74.95 0 top
R51  10k  [TRIMPOT_5MM]  88.39,74.95 0 top
R52  10k  [TRIMPOT_5MM]  94.74,74.95 0 top
R53  10K  [0603-RES]  92.84,60.71 90 top
R54  10K  [0603-RES]  92.84,68.33 270 top
R55  10K  [0603-RES]  102.87,60.71 90 top
R56  10k  [TRIMPOT_5MM]  105.41,74.95 0 top
R57  10k  [TRIMPOT_5MM]  111.76,74.95 0 top
R58  10k  [TRIMPOT_5MM]  118.11,74.95 0 top
R59  10K  [0603-RES]  116.2,60.71 90 top
R60  10K  [0603-RES]  116.2,68.33 270 top
R61  10K  [0603-RES]  9.4,104.39 90 top
R62  10k  [TRIMPOT_5MM]  11.94,118.63 0 top
R63  10k  [TRIMPOT_5MM]  18.29,118.63 0 top
R64  10k  [TRIMPOT_5MM]  24.64,118.63 0 top
R65  10K  [0603-RES]  22.73,104.39 90 top
R66  10K  [0603-RES]  22.73,112.01 270 top
R67  10K  [0603-RES]  32.77,104.39 90 top
R68  10k  [TRIMPOT_5MM]  35.31,118.63 0 top
R69  10k  [TRIMPOT_5MM]  41.66,118.63 0 top
R70  10k  [TRIMPOT_5MM]  48.01,118.63 0 top
R71  10K  [0603-RES]  46.1,104.39 90 top
R72  10K  [0603-RES]  46.1,112.01 270 top
R73  10K  [0603-RES]  56.13,104.39 90 top
R74  10k  [TRIMPOT_5MM]  58.67,118.63 0 top
R75  10k  [TRIMPOT_5MM]  65.02,118.63 0 top
R76  10k  [TRIMPOT_5MM]  71.37,118.63 0 top
R77  10K  [0603-RES]  69.47,104.39 90 top
R78  10K  [0603-RES]  69.47,112.01 270 top
R79  10K  [0603-RES]  79.5,104.39 90 top
R80  10k  [TRIMPOT_5MM]  82.04,118.63 0 top
R81  10k  [TRIMPOT_5MM]  88.39,118.63 0 top
R82  10k  [TRIMPOT_5MM]  94.74,118.63 0 top
R83  10K  [0603-RES]  92.84,104.39 90 top
R84  10K  [0603-RES]  92.84,112.01 270 top
R85  10K  [0603-RES]  102.87,104.39 90 top
R86  10k  [TRIMPOT_5MM]  105.41,118.63 0 top
R87  10k  [TRIMPOT_5MM]  111.76,118.63 0 top
R88  10k  [TRIMPOT_5MM]  118.11,118.63 0 top
R89  10K  [0603-RES]  116.2,104.39 90 top
R90  10K  [0603-RES]  116.2,112.01 270 top
R91  10K  [0603-RES]  9.4,148.08 90 top
R92  10k  [TRIMPOT_5MM]  11.94,162.32 0 top
R93  10k  [TRIMPOT_5MM]  18.29,162.32 0 top
R94  10k  [TRIMPOT_5MM]  24.64,162.32 0 top
R95  10K  [0603-RES]  22.73,148.08 90 top
R96  10K  [0603-RES]  22.73,155.7 270 top
R97  10K  [0603-RES]  32.77,148.08 90 top
R98  10k  [TRIMPOT_5MM]  35.31,162.32 0 top
R99  10k  [TRIMPOT_5MM]  41.66,162.32 0 top
R100  10k  [TRIMPOT_5MM]  48.01,162.32 0 top
R101  10K  [0603-RES]  46.1,148.08 90 top
R102  10K  [0603-RES]  46.1,155.7 270 top
R103  10K  [0603-RES]  56.13,148.08 90 top
R104  10k  [TRIMPOT_5MM]  58.67,162.32 0 top
R105  10k  [TRIMPOT_5MM]  65.02,162.32 0 top
R106  10k  [TRIMPOT_5MM]  71.37,162.32 0 top
R107  10K  [0603-RES]  69.47,148.08 90 top
R108  10K  [0603-RES]  69.47,155.7 270 top
R109  10K  [0603-RES]  79.5,148.08 90 top
R110  10k  [TRIMPOT_5MM]  82.04,162.32 0 top
R111  10k  [TRIMPOT_5MM]  88.39,162.32 0 top
R112  10k  [TRIMPOT_5MM]  94.74,162.32 0 top
R113  10K  [0603-RES]  92.84,148.08 90 top
R114  10K  [0603-RES]  92.84,155.7 270 top
R115  10K  [0603-RES]  102.87,148.08 90 top
R116  10k  [TRIMPOT_5MM]  105.41,162.32 0 top
R117  10k  [TRIMPOT_5MM]  111.76,162.32 0 top
R118  10k  [TRIMPOT_5MM]  118.11,162.32 0 top
R119  10K  [0603-RES]  116.2,148.08 90 top
R120  10K  [0603-RES]  116.2,155.7 270 top
R121  10K  [0603-RES]  9.4,191.77 90 top
R122  10k  [TRIMPOT_5MM]  11.94,206.01 0 top
R123  10k  [TRIMPOT_5MM]  18.29,206.01 0 top
R124  10k  [TRIMPOT_5MM]  24.64,206.01 0 top
R125  10K  [0603-RES]  22.73,191.77 90 top
R126  10K  [0603-RES]  22.73,199.39 270 top
R127  10K  [0603-RES]  32.77,191.77 90 top
R128  10k  [TRIMPOT_5MM]  35.31,206.01 0 top
R129  10k  [TRIMPOT_5MM]  41.66,206.01 0 top
R130  10k  [TRIMPOT_5MM]  48.01,206.01 0 top
R131  10K  [0603-RES]  46.1,191.77 90 top
R132  10K  [0603-RES]  46.1,199.39 270 top
R133  10K  [0603-RES]  56.13,191.77 90 top
R134  10k  [TRIMPOT_5MM]  58.67,206.01 0 top
R135  10k  [TRIMPOT_5MM]  65.02,206.01 0 top
R136  10k  [TRIMPOT_5MM]  71.37,206.01 0 top
R137  10K  [0603-RES]  69.47,191.77 90 top
R138  10K  [0603-RES]  69.47,199.39 270 top
R139  10K  [0603-RES]  79.5,191.77 90 top
R140  10k  [TRIMPOT_5MM]  82.04,206.01 0 top
R141  10k  [TRIMPOT_5MM]  88.39,206.01 0 top
R142  10k  [TRIMPOT_5MM]  94.74,206.01 0 top
R143  10K  [0603-RES]  92.84,191.77 90 top
R144  10K  [0603-RES]  92.84,199.39 270 top
R145  10K  [0603-RES]  102.87,191.77 90 top
R146  10k  [TRIMPOT_5MM]  105.41,206.01 0 top
R147  10k  [TRIMPOT_5MM]  111.76,206.01 0 top
R148  10k  [TRIMPOT_5MM]  118.11,206.01 0 top
R149  10K  [0603-RES]  116.2,191.77 90 top
R150  10K  [0603-RES]  116.2,199.39 270 top
R151  10K  [0603-RES]  9.4,235.46 90 top
R152  10k  [TRIMPOT_5MM]  11.94,249.7 0 top
R153  10k  [TRIMPOT_5MM]  18.29,249.7 0 top
R154  10k  [TRIMPOT_5MM]  24.64,249.7 0 top
R155  10K  [0603-RES]  22.73,235.46 90 top
R156  10K  [0603-RES]  22.73,243.08 270 top
R157  10K  [0603-RES]  32.77,235.46 90 top
R158  10k  [TRIMPOT_5MM]  35.31,249.7 0 top
R159  10k  [TRIMPOT_5MM]  41.66,249.7 0 top
R160  10k  [TRIMPOT_5MM]  48.01,249.7 0 top
R161  10K  [0603-RES]  46.1,235.46 90 top
R162  10K  [0603-RES]  46.1,243.08 270 top
R163  10K  [0603-RES]  56.13,235.46 90 top
R164  10k  [TRIMPOT_5MM]  58.67,249.7 0 top
R165  10k  [TRIMPOT_5MM]  65.02,249.7 0 top
R166  10k  [TRIMPOT_5MM]  71.37,249.7 0 top
R167  10K  [0603-RES]  69.47,235.46 90 top
R168  10K  [0603-RES]  69.47,243.08 270 top
R169  10K  [0603-RES]  79.5,235.46 90 top
R170  10k  [TRIMPOT_5MM]  82.04,249.7 0 top
R171  10k  [TRIMPOT_5MM]  88.39,249.7 0 top
R172  10k  [TRIMPOT_5MM]  94.74,249.7 0 top
R173  10K  [0603-RES]  92.84,235.46 90 top
R174  10K  [0603-RES]  92.84,243.08 270 top
R175  10K  [0603-RES]  102.87,235.46 90 top
R176  10k  [TRIMPOT_5MM]  105.41,249.7 0 top
R177  10k  [TRIMPOT_5MM]  111.76,249.7 0 top
R178  10k  [TRIMPOT_5MM]  118.11,249.7 0 top
R179  10K  [0603-RES]  116.2,235.46 90 top
R180  10K  [0603-RES]  116.2,243.08 270 top
SJ1  N.O.  [PAD-JUMPER-2-NO_YES_SILK]  20.83,38.61 0 bottom
SJ2  N.O.  [PAD-JUMPER-2-NO_YES_SILK]  23.37,38.61 0 bottom
SJ3  N.O.  [PAD-JUMPER-2-NO_YES_SILK]  44.2,38.61 0 bottom
SJ4  N.O.  [PAD-JUMPER-2-NO_YES_SILK]  46.74,38.61 0 bottom
SJ5  N.O.  [PAD-JUMPER-2-NO_YES_SILK]  67.56,38.61 0 bottom
SJ6  N.O.  [PAD-JUMPER-2-NO_YES_SILK]  70.1,38.61 0 bottom
SJ7  N.O.  [PAD-JUMPER-2-NO_YES_SILK]  90.93,38.61 0 bottom
SJ8  N.O.  [PAD-JUMPER-2-NO_YES_SILK]  93.47,38.61 0 bottom
SJ9  N.O.  [PAD-JUMPER-2-NO_YES_SILK]  114.3,38.61 0 bottom
SJ10  N.O.  [PAD-JUMPER-2-NO_YES_SILK]  116.84,38.61 0 bottom
SJ11  N.O.  [PAD-JUMPER-2-NO_YES_SILK]  20.83,82.3 0 bottom
SJ12  N.O.  [PAD-JUMPER-2-NO_YES_SILK]  23.37,82.3 0 bottom
SJ13  N.O.  [PAD-JUMPER-2-NO_YES_SILK]  44.2,82.3 0 bottom
SJ14  N.O.  [PAD-JUMPER-2-NO_YES_SILK]  46.74,82.3 0 bottom
SJ15  N.O.  [PAD-JUMPER-2-NO_YES_SILK]  67.56,82.3 0 bottom
SJ16  N.O.  [PAD-JUMPER-2-NO_YES_SILK]  70.1,82.3 0 bottom
SJ17  N.O.  [PAD-JUMPER-2-NO_YES_SILK]  90.93,82.3 0 bottom
SJ18  N.O.  [PAD-JUMPER-2-NO_YES_SILK]  93.47,82.3 0 bottom
SJ19  N.O.  [PAD-JUMPER-2-NO_YES_SILK]  114.3,82.3 0 bottom
SJ20  N.O.  [PAD-JUMPER-2-NO_YES_SILK]  116.84,82.3 0 bottom
SJ21  N.O.  [PAD-JUMPER-2-NO_YES_SILK]  20.83,125.98 0 bottom
SJ22  N.O.  [PAD-JUMPER-2-NO_YES_SILK]  23.37,125.98 0 bottom
SJ23  N.O.  [PAD-JUMPER-2-NO_YES_SILK]  44.2,125.98 0 bottom
SJ24  N.O.  [PAD-JUMPER-2-NO_YES_SILK]  46.74,125.98 0 bottom
SJ25  N.O.  [PAD-JUMPER-2-NO_YES_SILK]  67.56,125.98 0 bottom
SJ26  N.O.  [PAD-JUMPER-2-NO_YES_SILK]  70.1,125.98 0 bottom
SJ27  N.O.  [PAD-JUMPER-2-NO_YES_SILK]  90.93,125.98 0 bottom
SJ28  N.O.  [PAD-JUMPER-2-NO_YES_SILK]  93.47,125.98 0 bottom
SJ29  N.O.  [PAD-JUMPER-2-NO_YES_SILK]  114.3,125.98 0 bottom
SJ30  N.O.  [PAD-JUMPER-2-NO_YES_SILK]  116.84,125.98 0 bottom
SJ31  N.O.  [PAD-JUMPER-2-NO_YES_SILK]  20.83,169.67 0 bottom
SJ32  N.O.  [PAD-JUMPER-2-NO_YES_SILK]  23.37,169.67 0 bottom
SJ33  N.O.  [PAD-JUMPER-2-NO_YES_SILK]  44.2,169.67 0 bottom
SJ34  N.O.  [PAD-JUMPER-2-NO_YES_SILK]  46.74,169.67 0 bottom
SJ35  N.O.  [PAD-JUMPER-2-NO_YES_SILK]  67.56,169.67 0 bottom
SJ36  N.O.  [PAD-JUMPER-2-NO_YES_SILK]  70.1,169.67 0 bottom
SJ37  N.O.  [PAD-JUMPER-2-NO_YES_SILK]  90.93,169.67 0 bottom
SJ38  N.O.  [PAD-JUMPER-2-NO_YES_SILK]  93.47,169.67 0 bottom
SJ39  N.O.  [PAD-JUMPER-2-NO_YES_SILK]  114.3,169.67 0 bottom
SJ40  N.O.  [PAD-JUMPER-2-NO_YES_SILK]  116.84,169.67 0 bottom
SJ41  N.O.  [PAD-JUMPER-2-NO_YES_SILK]  20.83,213.36 0 bottom
SJ42  N.O.  [PAD-JUMPER-2-NO_YES_SILK]  23.37,213.36 0 bottom
SJ43  N.O.  [PAD-JUMPER-2-NO_YES_SILK]  44.2,213.36 0 bottom
SJ44  N.O.  [PAD-JUMPER-2-NO_YES_SILK]  46.74,213.36 0 bottom
SJ45  N.O.  [PAD-JUMPER-2-NO_YES_SILK]  67.56,213.36 0 bottom
SJ46  N.O.  [PAD-JUMPER-2-NO_YES_SILK]  70.1,213.36 0 bottom
SJ47  N.O.  [PAD-JUMPER-2-NO_YES_SILK]  90.93,213.36 0 bottom
SJ48  N.O.  [PAD-JUMPER-2-NO_YES_SILK]  93.47,213.36 0 bottom
SJ49  N.O.  [PAD-JUMPER-2-NO_YES_SILK]  114.3,213.36 0 bottom
SJ50  N.O.  [PAD-JUMPER-2-NO_YES_SILK]  116.84,213.36 0 bottom
SJ51  N.O.  [PAD-JUMPER-2-NO_YES_SILK]  20.83,257.05 0 bottom
SJ52  N.O.  [PAD-JUMPER-2-NO_YES_SILK]  23.37,257.05 0 bottom
SJ53  N.O.  [PAD-JUMPER-2-NO_YES_SILK]  44.2,257.05 0 bottom
SJ54  N.O.  [PAD-JUMPER-2-NO_YES_SILK]  46.74,257.05 0 bottom
SJ55  N.O.  [PAD-JUMPER-2-NO_YES_SILK]  67.56,257.05 0 bottom
SJ56  N.O.  [PAD-JUMPER-2-NO_YES_SILK]  70.1,257.05 0 bottom
SJ57  N.O.  [PAD-JUMPER-2-NO_YES_SILK]  90.93,257.05 0 bottom
SJ58  N.O.  [PAD-JUMPER-2-NO_YES_SILK]  93.47,257.05 0 bottom
SJ59  N.O.  [PAD-JUMPER-2-NO_YES_SILK]  114.3,257.05 0 bottom
SJ60  N.O.  [PAD-JUMPER-2-NO_YES_SILK]  116.84,257.05 0 bottom
STANDOFF1  STAND-OFF  [STAND-OFF]  10.03,10.03 0 top
STANDOFF2  STAND-OFF  [STAND-OFF]  26.54,10.03 0 top
STANDOFF3  STAND-OFF  [STAND-OFF]  10.03,46.86 0 top
STANDOFF4  STAND-OFF  [STAND-OFF]  26.54,46.86 0 top
STANDOFF5  STAND-OFF  [STAND-OFF]  33.4,10.03 0 top
STANDOFF6  STAND-OFF  [STAND-OFF]  49.91,10.03 0 top
STANDOFF7  STAND-OFF  [STAND-OFF]  33.4,46.86 0 top
STANDOFF8  STAND-OFF  [STAND-OFF]  49.91,46.86 0 top
STANDOFF9  STAND-OFF  [STAND-OFF]  56.77,10.03 0 top
STANDOFF10  STAND-OFF  [STAND-OFF]  73.28,10.03 0 top
STANDOFF11  STAND-OFF  [STAND-OFF]  56.77,46.86 0 top
STANDOFF12  STAND-OFF  [STAND-OFF]  73.28,46.86 0 top
STANDOFF13  STAND-OFF  [STAND-OFF]  80.14,10.03 0 top
STANDOFF14  STAND-OFF  [STAND-OFF]  96.65,10.03 0 top
STANDOFF15  STAND-OFF  [STAND-OFF]  80.14,46.86 0 top
STANDOFF16  STAND-OFF  [STAND-OFF]  96.65,46.86 0 top
STANDOFF17  STAND-OFF  [STAND-OFF]  103.5,10.03 0 top
STANDOFF18  STAND-OFF  [STAND-OFF]  120.02,10.03 0 top
STANDOFF19  STAND-OFF  [STAND-OFF]  103.5,46.86 0 top
STANDOFF20  STAND-OFF  [STAND-OFF]  120.02,46.86 0 top
STANDOFF21  STAND-OFF  [STAND-OFF]  10.03,53.72 0 top
STANDOFF22  STAND-OFF  [STAND-OFF]  26.54,53.72 0 top
STANDOFF23  STAND-OFF  [STAND-OFF]  10.03,90.55 0 top
STANDOFF24  STAND-OFF  [STAND-OFF]  26.54,90.55 0 top
STANDOFF25  STAND-OFF  [STAND-OFF]  33.4,53.72 0 top
STANDOFF26  STAND-OFF  [STAND-OFF]  49.91,53.72 0 top
STANDOFF27  STAND-OFF  [STAND-OFF]  33.4,90.55 0 top
STANDOFF28  STAND-OFF  [STAND-OFF]  49.91,90.55 0 top
STANDOFF29  STAND-OFF  [STAND-OFF]  56.77,53.72 0 top
STANDOFF30  STAND-OFF  [STAND-OFF]  73.28,53.72 0 top
STANDOFF31  STAND-OFF  [STAND-OFF]  56.77,90.55 0 top
STANDOFF32  STAND-OFF  [STAND-OFF]  73.28,90.55 0 top
STANDOFF33  STAND-OFF  [STAND-OFF]  80.14,53.72 0 top
STANDOFF34  STAND-OFF  [STAND-OFF]  96.65,53.72 0 top
STANDOFF35  STAND-OFF  [STAND-OFF]  80.14,90.55 0 top
STANDOFF36  STAND-OFF  [STAND-OFF]  96.65,90.55 0 top
STANDOFF37  STAND-OFF  [STAND-OFF]  103.5,53.72 0 top
STANDOFF38  STAND-OFF  [STAND-OFF]  120.02,53.72 0 top
STANDOFF39  STAND-OFF  [STAND-OFF]  103.5,90.55 0 top
STANDOFF40  STAND-OFF  [STAND-OFF]  120.02,90.55 0 top
STANDOFF41  STAND-OFF  [STAND-OFF]  10.03,97.41 0 top
STANDOFF42  STAND-OFF  [STAND-OFF]  26.54,97.41 0 top
STANDOFF43  STAND-OFF  [STAND-OFF]  10.03,134.24 0 top
STANDOFF44  STAND-OFF  [STAND-OFF]  26.54,134.24 0 top
STANDOFF45  STAND-OFF  [STAND-OFF]  33.4,97.41 0 top
STANDOFF46  STAND-OFF  [STAND-OFF]  49.91,97.41 0 top
STANDOFF47  STAND-OFF  [STAND-OFF]  33.4,134.24 0 top
STANDOFF48  STAND-OFF  [STAND-OFF]  49.91,134.24 0 top
STANDOFF49  STAND-OFF  [STAND-OFF]  56.77,97.41 0 top
STANDOFF50  STAND-OFF  [STAND-OFF]  73.28,97.41 0 top
STANDOFF51  STAND-OFF  [STAND-OFF]  56.77,134.24 0 top
STANDOFF52  STAND-OFF  [STAND-OFF]  73.28,134.24 0 top
STANDOFF53  STAND-OFF  [STAND-OFF]  80.14,97.41 0 top
STANDOFF54  STAND-OFF  [STAND-OFF]  96.65,97.41 0 top
STANDOFF55  STAND-OFF  [STAND-OFF]  80.14,134.24 0 top
STANDOFF56  STAND-OFF  [STAND-OFF]  96.65,134.24 0 top
STANDOFF57  STAND-OFF  [STAND-OFF]  103.5,97.41 0 top
STANDOFF58  STAND-OFF  [STAND-OFF]  120.02,97.41 0 top
STANDOFF59  STAND-OFF  [STAND-OFF]  103.5,134.24 0 top
STANDOFF60  STAND-OFF  [STAND-OFF]  120.02,134.24 0 top
STANDOFF61  STAND-OFF  [STAND-OFF]  10.03,141.1 0 top
STANDOFF62  STAND-OFF  [STAND-OFF]  26.54,141.1 0 top
STANDOFF63  STAND-OFF  [STAND-OFF]  10.03,177.93 0 top
STANDOFF64  STAND-OFF  [STAND-OFF]  26.54,177.93 0 top
STANDOFF65  STAND-OFF  [STAND-OFF]  33.4,141.1 0 top
STANDOFF66  STAND-OFF  [STAND-OFF]  49.91,141.1 0 top
STANDOFF67  STAND-OFF  [STAND-OFF]  33.4,177.93 0 top
STANDOFF68  STAND-OFF  [STAND-OFF]  49.91,177.93 0 top
STANDOFF69  STAND-OFF  [STAND-OFF]  56.77,141.1 0 top
STANDOFF70  STAND-OFF  [STAND-OFF]  73.28,141.1 0 top
STANDOFF71  STAND-OFF  [STAND-OFF]  56.77,177.93 0 top
STANDOFF72  STAND-OFF  [STAND-OFF]  73.28,177.93 0 top
STANDOFF73  STAND-OFF  [STAND-OFF]  80.14,141.1 0 top
STANDOFF74  STAND-OFF  [STAND-OFF]  96.65,141.1 0 top
STANDOFF75  STAND-OFF  [STAND-OFF]  80.14,177.93 0 top
STANDOFF76  STAND-OFF  [STAND-OFF]  96.65,177.93 0 top
STANDOFF77  STAND-OFF  [STAND-OFF]  103.5,141.1 0 top
STANDOFF78  STAND-OFF  [STAND-OFF]  120.02,141.1 0 top
STANDOFF79  STAND-OFF  [STAND-OFF]  103.5,177.93 0 top
STANDOFF80  STAND-OFF  [STAND-OFF]  120.02,177.93 0 top
STANDOFF81  STAND-OFF  [STAND-OFF]  10.03,184.78 0 top
STANDOFF82  STAND-OFF  [STAND-OFF]  26.54,184.78 0 top
STANDOFF83  STAND-OFF  [STAND-OFF]  10.03,221.62 0 top
STANDOFF84  STAND-OFF  [STAND-OFF]  26.54,221.62 0 top
STANDOFF85  STAND-OFF  [STAND-OFF]  33.4,184.78 0 top
STANDOFF86  STAND-OFF  [STAND-OFF]  49.91,184.78 0 top
STANDOFF87  STAND-OFF  [STAND-OFF]  33.4,221.62 0 top
STANDOFF88  STAND-OFF  [STAND-OFF]  49.91,221.62 0 top
STANDOFF89  STAND-OFF  [STAND-OFF]  56.77,184.78 0 top
STANDOFF90  STAND-OFF  [STAND-OFF]  73.28,184.78 0 top
STANDOFF91  STAND-OFF  [STAND-OFF]  56.77,221.62 0 top
STANDOFF92  STAND-OFF  [STAND-OFF]  73.28,221.62 0 top
STANDOFF93  STAND-OFF  [STAND-OFF]  80.14,184.78 0 top
STANDOFF94  STAND-OFF  [STAND-OFF]  96.65,184.78 0 top
STANDOFF95  STAND-OFF  [STAND-OFF]  80.14,221.62 0 top
STANDOFF96  STAND-OFF  [STAND-OFF]  96.65,221.62 0 top
STANDOFF97  STAND-OFF  [STAND-OFF]  103.5,184.78 0 top
STANDOFF98  STAND-OFF  [STAND-OFF]  120.02,184.78 0 top
STANDOFF99  STAND-OFF  [STAND-OFF]  103.5,221.62 0 top
STANDOFF100  STAND-OFF  [STAND-OFF]  120.02,221.62 0 top
STANDOFF101  STAND-OFF  [STAND-OFF]  10.03,228.47 0 top
STANDOFF102  STAND-OFF  [STAND-OFF]  26.54,228.47 0 top
STANDOFF103  STAND-OFF  [STAND-OFF]  10.03,265.3 0 top
STANDOFF104  STAND-OFF  [STAND-OFF]  26.54,265.3 0 top
STANDOFF105  STAND-OFF  [STAND-OFF]  33.4,228.47 0 top
STANDOFF106  STAND-OFF  [STAND-OFF]  49.91,228.47 0 top
STANDOFF107  STAND-OFF  [STAND-OFF]  33.4,265.3 0 top
STANDOFF108  STAND-OFF  [STAND-OFF]  49.91,265.3 0 top
STANDOFF109  STAND-OFF  [STAND-OFF]  56.77,228.47 0 top
STANDOFF110  STAND-OFF  [STAND-OFF]  73.28,228.47 0 top
STANDOFF111  STAND-OFF  [STAND-OFF]  56.77,265.3 0 top
STANDOFF112  STAND-OFF  [STAND-OFF]  73.28,265.3 0 top
STANDOFF113  STAND-OFF  [STAND-OFF]  80.14,228.47 0 top
STANDOFF114  STAND-OFF  [STAND-OFF]  96.65,228.47 0 top
STANDOFF115  STAND-OFF  [STAND-OFF]  80.14,265.3 0 top
STANDOFF116  STAND-OFF  [STAND-OFF]  96.65,265.3 0 top
STANDOFF117  STAND-OFF  [STAND-OFF]  103.5,228.47 0 top
STANDOFF118  STAND-OFF  [STAND-OFF]  120.02,228.47 0 top
STANDOFF119  STAND-OFF  [STAND-OFF]  103.5,265.3 0 top
STANDOFF120  STAND-OFF  [STAND-OFF]  120.02,265.3 0 top
TP1  TEST-POINT3X4  [PAD.03X.04]  10.67,32.26 0 bottom
TP2  TEST-POINT3X4  [PAD.03X.04]  18.92,32.26 0 bottom
TP3  TEST-POINT3X4  [PAD.03X.04]  24.64,32.26 0 bottom
TP4  TEST-POINT3X4  [PAD.03X.04]  34.04,32.26 0 bottom
TP5  TEST-POINT3X4  [PAD.03X.04]  42.29,32.26 0 bottom
TP6  TEST-POINT3X4  [PAD.03X.04]  48.01,32.26 0 bottom
TP7  TEST-POINT3X4  [PAD.03X.04]  57.4,32.26 0 bottom
TP8  TEST-POINT3X4  [PAD.03X.04]  65.66,32.26 0 bottom
TP9  TEST-POINT3X4  [PAD.03X.04]  71.37,32.26 0 bottom
TP10  TEST-POINT3X4  [PAD.03X.04]  80.77,32.26 0 bottom
TP11  TEST-POINT3X4  [PAD.03X.04]  89.03,32.26 0 bottom
TP12  TEST-POINT3X4  [PAD.03X.04]  94.74,32.26 0 bottom
TP13  TEST-POINT3X4  [PAD.03X.04]  104.14,32.26 0 bottom
TP14  TEST-POINT3X4  [PAD.03X.04]  112.39,32.26 0 bottom
TP15  TEST-POINT3X4  [PAD.03X.04]  118.11,32.26 0 bottom
TP16  TEST-POINT3X4  [PAD.03X.04]  10.67,75.95 0 bottom
TP17  TEST-POINT3X4  [PAD.03X.04]  18.92,75.95 0 bottom
TP18  TEST-POINT3X4  [PAD.03X.04]  24.64,75.95 0 bottom
TP19  TEST-POINT3X4  [PAD.03X.04]  34.04,75.95 0 bottom
TP20  TEST-POINT3X4  [PAD.03X.04]  42.29,75.95 0 bottom
TP21  TEST-POINT3X4  [PAD.03X.04]  48.01,75.95 0 bottom
TP22  TEST-POINT3X4  [PAD.03X.04]  57.4,75.95 0 bottom
TP23  TEST-POINT3X4  [PAD.03X.04]  65.66,75.95 0 bottom
TP24  TEST-POINT3X4  [PAD.03X.04]  71.37,75.95 0 bottom
TP25  TEST-POINT3X4  [PAD.03X.04]  80.77,75.95 0 bottom
TP26  TEST-POINT3X4  [PAD.03X.04]  89.03,75.95 0 bottom
TP27  TEST-POINT3X4  [PAD.03X.04]  94.74,75.95 0 bottom
TP28  TEST-POINT3X4  [PAD.03X.04]  104.14,75.95 0 bottom
TP29  TEST-POINT3X4  [PAD.03X.04]  112.39,75.95 0 bottom
TP30  TEST-POINT3X4  [PAD.03X.04]  118.11,75.95 0 bottom
TP31  TEST-POINT3X4  [PAD.03X.04]  10.67,119.63 0 bottom
TP32  TEST-POINT3X4  [PAD.03X.04]  18.92,119.63 0 bottom
TP33  TEST-POINT3X4  [PAD.03X.04]  24.64,119.63 0 bottom
TP34  TEST-POINT3X4  [PAD.03X.04]  34.04,119.63 0 bottom
TP35  TEST-POINT3X4  [PAD.03X.04]  42.29,119.63 0 bottom
TP36  TEST-POINT3X4  [PAD.03X.04]  48.01,119.63 0 bottom
TP37  TEST-POINT3X4  [PAD.03X.04]  57.4,119.63 0 bottom
TP38  TEST-POINT3X4  [PAD.03X.04]  65.66,119.63 0 bottom
TP39  TEST-POINT3X4  [PAD.03X.04]  71.37,119.63 0 bottom
TP40  TEST-POINT3X4  [PAD.03X.04]  80.77,119.63 0 bottom
TP41  TEST-POINT3X4  [PAD.03X.04]  89.03,119.63 0 bottom
TP42  TEST-POINT3X4  [PAD.03X.04]  94.74,119.63 0 bottom
TP43  TEST-POINT3X4  [PAD.03X.04]  104.14,119.63 0 bottom
TP44  TEST-POINT3X4  [PAD.03X.04]  112.39,119.63 0 bottom
TP45  TEST-POINT3X4  [PAD.03X.04]  118.11,119.63 0 bottom
TP46  TEST-POINT3X4  [PAD.03X.04]  10.67,163.32 0 bottom
TP47  TEST-POINT3X4  [PAD.03X.04]  18.92,163.32 0 bottom
TP48  TEST-POINT3X4  [PAD.03X.04]  24.64,163.32 0 bottom
TP49  TEST-POINT3X4  [PAD.03X.04]  34.04,163.32 0 bottom
TP50  TEST-POINT3X4  [PAD.03X.04]  42.29,163.32 0 bottom
TP51  TEST-POINT3X4  [PAD.03X.04]  48.01,163.32 0 bottom
TP52  TEST-POINT3X4  [PAD.03X.04]  57.4,163.32 0 bottom
TP53  TEST-POINT3X4  [PAD.03X.04]  65.66,163.32 0 bottom
TP54  TEST-POINT3X4  [PAD.03X.04]  71.37,163.32 0 bottom
TP55  TEST-POINT3X4  [PAD.03X.04]  80.77,163.32 0 bottom
TP56  TEST-POINT3X4  [PAD.03X.04]  89.03,163.32 0 bottom
TP57  TEST-POINT3X4  [PAD.03X.04]  94.74,163.32 0 bottom
TP58  TEST-POINT3X4  [PAD.03X.04]  104.14,163.32 0 bottom
TP59  TEST-POINT3X4  [PAD.03X.04]  112.39,163.32 0 bottom
TP60  TEST-POINT3X4  [PAD.03X.04]  118.11,163.32 0 bottom
TP61  TEST-POINT3X4  [PAD.03X.04]  10.67,207.01 0 bottom
TP62  TEST-POINT3X4  [PAD.03X.04]  18.92,207.01 0 bottom
TP63  TEST-POINT3X4  [PAD.03X.04]  24.64,207.01 0 bottom
TP64  TEST-POINT3X4  [PAD.03X.04]  34.04,207.01 0 bottom
TP65  TEST-POINT3X4  [PAD.03X.04]  42.29,207.01 0 bottom
TP66  TEST-POINT3X4  [PAD.03X.04]  48.01,207.01 0 bottom
TP67  TEST-POINT3X4  [PAD.03X.04]  57.4,207.01 0 bottom
TP68  TEST-POINT3X4  [PAD.03X.04]  65.66,207.01 0 bottom
TP69  TEST-POINT3X4  [PAD.03X.04]  71.37,207.01 0 bottom
TP70  TEST-POINT3X4  [PAD.03X.04]  80.77,207.01 0 bottom
TP71  TEST-POINT3X4  [PAD.03X.04]  89.03,207.01 0 bottom
TP72  TEST-POINT3X4  [PAD.03X.04]  94.74,207.01 0 bottom
TP73  TEST-POINT3X4  [PAD.03X.04]  104.14,207.01 0 bottom
TP74  TEST-POINT3X4  [PAD.03X.04]  112.39,207.01 0 bottom
TP75  TEST-POINT3X4  [PAD.03X.04]  118.11,207.01 0 bottom
TP76  TEST-POINT3X4  [PAD.03X.04]  10.67,250.7 0 bottom
TP77  TEST-POINT3X4  [PAD.03X.04]  18.92,250.7 0 bottom
TP78  TEST-POINT3X4  [PAD.03X.04]  24.64,250.7 0 bottom
TP79  TEST-POINT3X4  [PAD.03X.04]  34.04,250.7 0 bottom
TP80  TEST-POINT3X4  [PAD.03X.04]  42.29,250.7 0 bottom
TP81  TEST-POINT3X4  [PAD.03X.04]  48.01,250.7 0 bottom
TP82  TEST-POINT3X4  [PAD.03X.04]  57.4,250.7 0 bottom
TP83  TEST-POINT3X4  [PAD.03X.04]  65.66,250.7 0 bottom
TP84  TEST-POINT3X4  [PAD.03X.04]  71.37,250.7 0 bottom
TP85  TEST-POINT3X4  [PAD.03X.04]  80.77,250.7 0 bottom
TP86  TEST-POINT3X4  [PAD.03X.04]  89.03,250.7 0 bottom
TP87  TEST-POINT3X4  [PAD.03X.04]  94.74,250.7 0 bottom
TP88  TEST-POINT3X4  [PAD.03X.04]  104.14,250.7 0 bottom
TP89  TEST-POINT3X4  [PAD.03X.04]  112.39,250.7 0 bottom
TP90  TEST-POINT3X4  [PAD.03X.04]  118.11,250.7 0 bottom
U1  ATTINY84  [SO14]  15.75,20.83 0 top
U2  ATTINY84  [SO14]  39.12,20.83 0 top
U3  ATTINY84  [SO14]  62.48,20.83 0 top
U4  ATTINY84  [SO14]  85.85,20.83 0 top
U5  ATTINY84  [SO14]  109.22,20.83 0 top
U6  ATTINY84  [SO14]  15.75,64.52 0 top
U7  ATTINY84  [SO14]  39.12,64.52 0 top
U8  ATTINY84  [SO14]  62.48,64.52 0 top
U9  ATTINY84  [SO14]  85.85,64.52 0 top
U10  ATTINY84  [SO14]  109.22,64.52 0 top
U11  ATTINY84  [SO14]  15.75,108.2 0 top
U12  ATTINY84  [SO14]  39.12,108.2 0 top
U13  ATTINY84  [SO14]  62.48,108.2 0 top
U14  ATTINY84  [SO14]  85.85,108.2 0 top
U15  ATTINY84  [SO14]  109.22,108.2 0 top
U16  ATTINY84  [SO14]  15.75,151.89 0 top
U17  ATTINY84  [SO14]  39.12,151.89 0 top
U18  ATTINY84  [SO14]  62.48,151.89 0 top
U19  ATTINY84  [SO14]  85.85,151.89 0 top
U20  ATTINY84  [SO14]  109.22,151.89 0 top
U21  ATTINY84  [SO14]  15.75,195.58 0 top
U22  ATTINY84  [SO14]  39.12,195.58 0 top
U23  ATTINY84  [SO14]  62.48,195.58 0 top
U24  ATTINY84  [SO14]  85.85,195.58 0 top
U25  ATTINY84  [SO14]  109.22,195.58 0 top
U26  ATTINY84  [SO14]  15.75,239.27 0 top
U27  ATTINY84  [SO14]  39.12,239.27 0 top
U28  ATTINY84  [SO14]  62.48,239.27 0 top
U29  ATTINY84  [SO14]  85.85,239.27 0 top
U30  ATTINY84  [SO14]  109.22,239.27 0 top
Y1  16MHZ  [RESONATOR-SMD]  13.21,14.48 180 top
Y2  16MHZ  [RESONATOR-SMD]  36.58,14.48 180 top
Y3  16MHZ  [RESONATOR-SMD]  59.94,14.48 180 top
Y4  16MHZ  [RESONATOR-SMD]  83.31,14.48 180 top
Y5  16MHZ  [RESONATOR-SMD]  106.68,14.48 180 top
Y6  16MHZ  [RESONATOR-SMD]  13.21,58.17 180 top
Y7  16MHZ  [RESONATOR-SMD]  36.58,58.17 180 top
Y8  16MHZ  [RESONATOR-SMD]  59.94,58.17 180 top
Y9  16MHZ  [RESONATOR-SMD]  83.31,58.17 180 top
Y10  16MHZ  [RESONATOR-SMD]  106.68,58.17 180 top
Y11  16MHZ  [RESONATOR-SMD]  13.21,101.85 180 top
Y12  16MHZ  [RESONATOR-SMD]  36.58,101.85 180 top
Y13  16MHZ  [RESONATOR-SMD]  59.94,101.85 180 top
Y14  16MHZ  [RESONATOR-SMD]  83.31,101.85 180 top
Y15  16MHZ  [RESONATOR-SMD]  106.68,101.85 180 top
Y16  16MHZ  [RESONATOR-SMD]  13.21,145.54 180 top
Y17  16MHZ  [RESONATOR-SMD]  36.58,145.54 180 top
Y18  16MHZ  [RESONATOR-SMD]  59.94,145.54 180 top
Y19  16MHZ  [RESONATOR-SMD]  83.31,145.54 180 top
Y20  16MHZ  [RESONATOR-SMD]  106.68,145.54 180 top
Y21  16MHZ  [RESONATOR-SMD]  13.21,189.23 180 top
Y22  16MHZ  [RESONATOR-SMD]  36.58,189.23 180 top
Y23  16MHZ  [RESONATOR-SMD]  59.94,189.23 180 top
Y24  16MHZ  [RESONATOR-SMD]  83.31,189.23 180 top
Y25  16MHZ  [RESONATOR-SMD]  106.68,189.23 180 top
Y26  16MHZ  [RESONATOR-SMD]  13.21,232.92 180 top
Y27  16MHZ  [RESONATOR-SMD]  36.58,232.92 180 top
Y28  16MHZ  [RESONATOR-SMD]  59.94,232.92 180 top
Y29  16MHZ  [RESONATOR-SMD]  83.31,232.92 180 top
Y30  16MHZ  [RESONATOR-SMD]  106.68,232.92 180 top

## Library data of the parts
C1 C3 C6 C8 C10 C12 C14 C16 C18 C20 C22 C24 C26 C28 C30 C32 C34 C36 C38 C40 C42 C44 C46 C48 C50 C52 C54 C56 C58 C60 = SparkFun-Capacitors; PROD_ID: CAP-00811
C2 C4 C5 C7 C9 C11 C13 C15 C17 C19 C21 C23 C25 C27 C29 C31 C33 C35 C37 C39 C41 C43 C45 C47 C49 C51 C53 C55 C57 C59 = SparkFun-Capacitors; PROD_ID: CAP-00810
E$1 = SparkFun-Retired
E$7 E$8 FID1-FID60 LOGO1-LOGO90 = SparkFun-Aesthetics
JP1-JP150 = SparkFun-Connectors
R1-R3 R8-R10 R14-R16 R20-R22 R26-R28 R32-R34 R38-R40 R44-R46 R50-R52 R56-R58 R62-R64 R68-R70 R74-R76 R80-R82 R86-R88 R92-R94 R98-R100 R104-R106 R110-R112 R116-R118 R122-R124 R128-R130 R134-R136 R140-R142 R146-R148 R152-R154 R158-R160 R164-R166 R170-R172 R176-R178 = SparkFun-Electromechanical; PROD_ID: RES-11156
R4-R7 R11-R13 R17-R19 R23-R25 R29-R31 R35-R37 R41-R43 R47-R49 R53-R55 R59-R61 R65-R67 R71-R73 R77-R79 R83-R85 R89-R91 R95-R97 R101-R103 R107-R109 R113-R115 R119-R121 R125-R127 R131-R133 R137-R139 R143-R145 R149-R151 R155-R157 R161-R163 R167-R169 R173-R175 R179 R180 = SparkFun-Resistors; PROD_ID: RES-00824
SJ1-SJ60 TP1-TP90 = SparkFun-Passives
STANDOFF1-STANDOFF120 = SparkFun-Electromechanical
U1-U30 = SparkFun-DigitalIC; PROD_ID: IC-11285
Y1-Y30 = SparkFun-FreqCtrl; PROD_ID: XTAL-08900